# Altium PCB PCB_Heart-Earrings-1.7_2025-02-13.pcbdoc
Units mm, origin at the board's own origin, x right, y up, seen from the top; angles counter-clockwise.
Board outline 48.95 x 57.72 mm, 2 copper layers (Top Layer, Bottom Layer); 85 components, 33 nets, 214 pads, 78 vias.
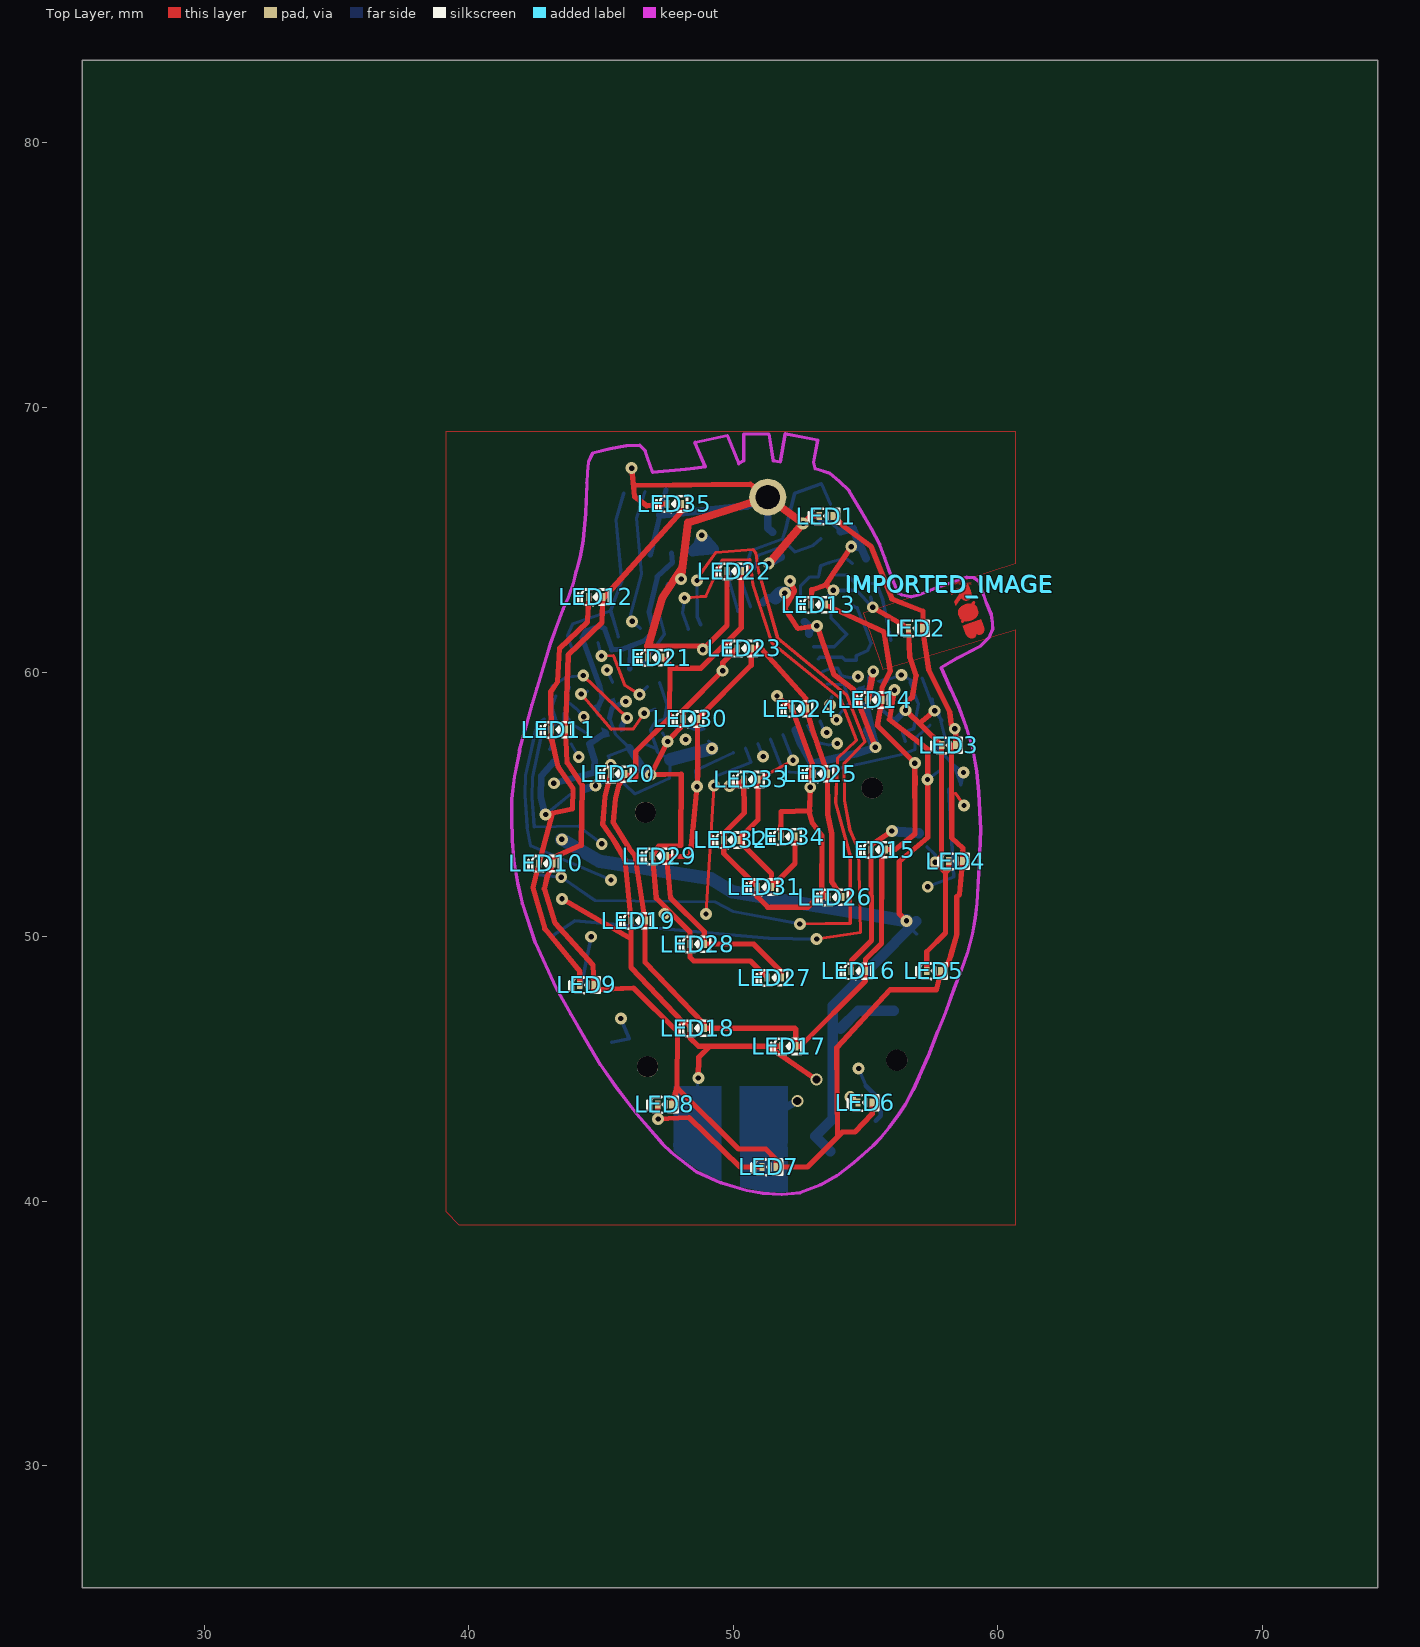
[diagram p0: Top Layer view]
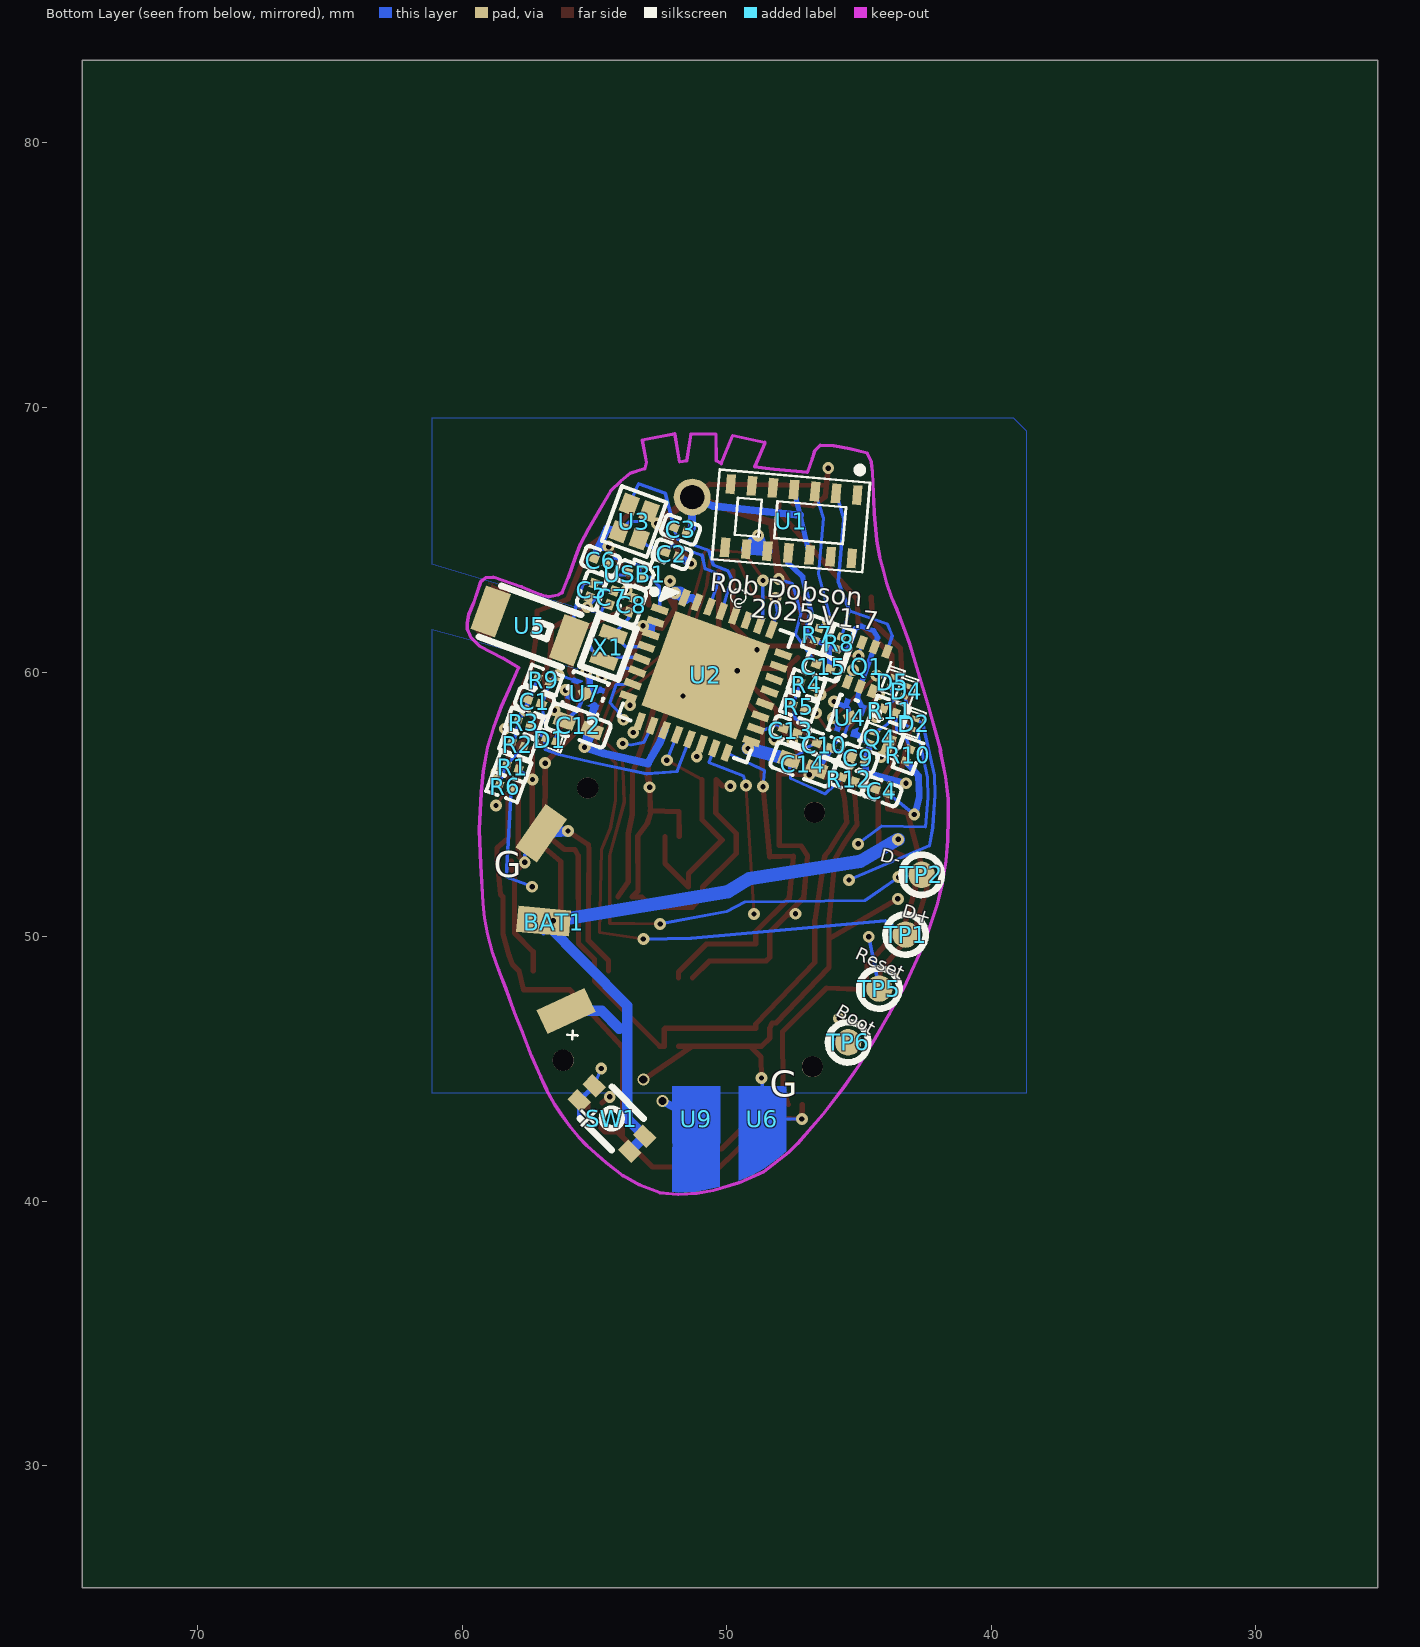
[diagram p1: Bottom Layer view, seen from below]

## Layer stack, top to bottom
Top Layer: signal copper (thickness not stored)
Dielectric: dielectric 0.32, FR-4, Dk 4.8
Bottom Layer: signal copper (thickness not stored)

## Board outline
74.35,25.4 25.4,25.4 25.4,83.12 74.35,83.12

## Components (designator, comment, footprint, x,y, rotation, side; value= is the part's Value field where it differs from the comment)
BAT1 "CP1154 li-ion" CP1154_LI_ION_NO_SILK 51.35,50.1 r95 bottom
C1 "1uF" C0201 57.26,58.88 r20 bottom
C2 "10pF" C0201 52.07,64.45 r200 bottom
C3 "10pF" C0201 51.74,65.38 r200 bottom
C4 "1uF" C0201 44.13,55.49 r200 bottom
C5 "10pF" C0201 55.1,63.09 r290 bottom
C6 "10pF" C0201 54.76,64.2 r20 bottom
C7 "10pF" C0201 54.34,62.81 r110 bottom
C8 "10pF" C0201 53.6,62.53 r290 bottom
C9 "1uF" C0201 45.02,56.74 r20 bottom
C10 "1uF" C0201 46.33,57.23 r200 bottom
C12 "10uF" C0402 55.61,57.98 r20 bottom
C13 "1uF" C0201 47.59,57.78 r200 bottom
C14 "10uF" C0402 47.12,56.51 r200 bottom
C15 "1uF" C0201 46.35,60.21 r20 bottom
D1 "BAT30F4-MS" X3-DFN0603-2_L0.6-W0.3-RD 56.69,57.44 r200 bottom
D2 "BAT30F4-MS" X3-DFN0603-2_L0.6-W0.3-RD 42.93,58.04 r110 bottom
D4 "BAT30F4-MS" X3-DFN0603-2_L0.6-W0.3-RD 43.22,59.28 r110 bottom
D5 "BAT30F4-MS" X3-DFN0603-2_L0.6-W0.3-RD 43.74,59.62 r110 bottom
IMPORTED_IMAGE "IMPORTED_IMAGE" IMPORTED_IMAGE#1 58.157,63.332 r0 top
IMPORTED_IMAGE "IMPORTED_IMAGE" IMPORTED_IMAGE#2 58.198,63.302 r0 top
LED1 "XL-0201SURC" LED-SMD_L0.7-W0.4-RD 53.51,65.9 r0 top
LED2 "XL-0201SURC" LED-SMD_L0.7-W0.4-RD 56.89,61.659 r0 top
LED3 "XL-0201SURC" LED-SMD_L0.7-W0.4-RD 58.14,57.24 r0 top
LED4 "XL-0201SURC" LED-SMD_L0.7-W0.4-RD 58.41,52.86 r0 top
LED5 "XL-0201SURC" LED-SMD_L0.7-W0.4-RD 57.58,48.71 r0 top
LED6 "XL-0201SURC" LED-SMD_L0.7-W0.4-RD 54.98,43.73 r0 top
LED7 "XL-0201SURC" LED-SMD_L0.7-W0.4-RD 51.35,41.3 r0 top
LED8 "XL-0201SURC" LED-SMD_L0.7-W0.4-RD 47.41,43.66 r0 top
LED9 "XL-0201SURC" LED-SMD_L0.7-W0.4-RD 44.47,48.18 r0 top
LED10 "XL-0201SURC" LED-SMD_L0.7-W0.4-RD 42.92,52.769 r0 top
LED11 "XL-0201SURC" LED-SMD_L0.7-W0.4-RD 43.39,57.83 r0 top
LED12 "XL-0201SURC" LED-SMD_L0.7-W0.4-RD 44.8,62.84 r0 top
LED13 "XL-0201SURC" LED-SMD_L0.7-W0.4-RD 53.207,62.548 r0 top
LED14 "XL-0201SURC" LED-SMD_L0.7-W0.4-RD 55.35,58.95 r0 top
LED15 "XL-0201SURC" LED-SMD_L0.7-W0.4-RD 55.47,53.29 r0 top
LED16 "XL-0201SURC" LED-SMD_L0.7-W0.4-RD 54.731,48.705 r0 top
LED17 "XL-0201SURC" LED-SMD_L0.7-W0.4-RD 52.09,45.86 r0 top
LED18 "XL-0201SURC" LED-SMD_L0.7-W0.4-RD 48.635,46.546 r0 top
LED19 "XL-0201SURC" LED-SMD_L0.7-W0.4-RD 46.4,50.61 r0 top
LED20 "XL-0201SURC" LED-SMD_L0.7-W0.4-RD 45.63,56.15 r0 top
LED21 "XL-0201SURC" LED-SMD_L0.7-W0.4-RD 47.04,60.55 r0 top
LED22 "XL-0201SURC" LED-SMD_L0.7-W0.4-RD 50.032,63.818 r0 top
LED23 "XL-0201SURC" LED-SMD_L0.7-W0.4-RD 50.413,60.897 r0 top
LED24 "XL-0201SURC" LED-SMD_L0.7-W0.4-RD 52.49,58.62 r0 top
LED25 "XL-0201SURC" LED-SMD_L0.7-W0.4-RD 53.29,56.16 r0 top
LED26 "XL-0201SURC" LED-SMD_L0.7-W0.4-RD 53.842,51.499 r0 top
LED27 "XL-0201SURC" LED-SMD_L0.7-W0.4-RD 51.556,48.451 r0 top
LED28 "XL-0201SURC" LED-SMD_L0.7-W0.4-RD 48.635,49.721 r0 top
LED29 "XL-0201SURC" LED-SMD_L0.7-W0.4-RD 47.21,53.05 r0 top
LED30 "XL-0201SURC" LED-SMD_L0.7-W0.4-RD 48.381,58.23 r0 top
LED31 "XL-0201SURC" LED-SMD_L0.7-W0.4-RD 51.175,51.88 r0 top
LED32 "XL-0201SURC" LED-SMD_L0.7-W0.4-RD 49.905,53.658 r0 top
LED33 "XL-0201SURC" LED-SMD_L0.7-W0.4-RD 50.667,55.944 r0 top
LED34 "XL-0201SURC" LED-SMD_L0.7-W0.4-RD 52.064,53.785 r0 top
LED35 "XL-0201SURC" LED-SMD_L0.7-W0.4-RD 47.76,66.36 r0 top
Q1 "NTZD3154NT1G" SOT-563_L1.6-W1.2-P0.50-LS1.6-TL 44.69,60.2 r290 bottom
Q4 "DMP21D0UFB4-7B" X2-DFN1006-3_L1.0-W0.6-BR 44.18,57.4 r200 bottom
R1 "4.7MΩ" R0201 58.09,56.41 r20 bottom
R2 "2.2MΩ" R0201 57.89,57.26 r20 bottom
R3 "100kΩ" R0201 57.66,58.08 r20 bottom
R4 "10kΩ" R0201 46.98,59.53 r200 bottom
R5 "10kΩ" R0201 47.27,58.69 r200 bottom
R6 "2.2MΩ" R0201 58.37,55.66 r20 bottom
R7 "10kΩ" R0201 46.58,61.42 r110 bottom
R8 "10kΩ" R0201 45.74,61.1 r110 bottom
R9 "10MΩ" R0201 56.91,59.7 r20 bottom
R10 "10kΩ" R0201 43.15,56.86 r290 bottom
R11 "100kΩ" R0201 43.84,58.54 r200 bottom
R12 "10kΩ" R0201 45.39,55.95 r200 bottom
SW1 "SKTAAAE010" KEY-SMD_4P-L2.6-W1.6-P0.80-LS3.0 54.34,43.13 r225 bottom
TP1 "D+" TESTPAD0 43.24,50.08 r0 bottom
TP2 "D-" TESTPAD0 42.63,52.34 r0 bottom
TP5 "EN" TESTPAD0 44.23,48.04 r0 bottom
TP6 "9" TESTPAD0 45.41,46.01 r0 bottom
U1 "MAX30101EFD+T" OESIP-14_L5.6-W3.3-P0.80-TL 47.56,65.7 r95 bottom
U2 "ESP32-C3FH4" QFN-32_L5.0-W5.0-P0.50-TL-EP3.7 50.794,59.881 r20 bottom
U3 "40MHz" CRYSTAL-SMD_4P-L1.6-W1.2-BL 53.49,65.69 r290 bottom
U4 "NCP170AMX180TCG" XDFN-4_L1.0-W1.0-P0.65-BL-EP 45.32,58.27 r200 bottom
U5 "ANT3216LL00R2400A" ANT-SMD_L3.2-W1.6 57.44,61.75 r200 bottom
U6 "SLIDE_CONTACT" SLIDE_CONTACT 48.65,43.1 r0 bottom
U7 "NCP167BMX330TBG" XDFN-4_L1.0-W1.0-P0.65-BL-EP 55.34,59.19 r290 bottom
U9 "SLIDE_CONTACT" SLIDE_CONTACT 51.15,43.1 r0 bottom
USB1 "1nH" L0201 53.48,63.69 r20 bottom
X1 "32.768kHz" CRYSTAL-SMD_L1.7-W1.1 54.47,60.94 r290 bottom

## Footprints (in the part's own frame and the unit in brackets; to place one, negate y for a bottom-side part, rotate by r counter-clockwise, add the part's x,y. Pads: shape width x height; smd on the part's side, far side on the other; paste and mask are expansions set on the pad)
ANT-SMD_L3.2-W1.6 [mm]
  rect 1x1.75 smd paste+0 mask+0.051: 1(1.578,0) 2(-1.578,0)
  silkscreen extent -1.68,-1.06 1.68,1.05
C0201 [mm]
  rect 0.368x0.324 smd paste-100 mask+0.051: 1(0.274,0) 2(-0.274,0)
  silkscreen extent -0.69,-0.39 0.69,0.39
C0402 [mm]
  rect 0.79x0.54 smd paste-100 mask+0.051: 1(0.545,0) 2(-0.545,0)
  silkscreen extent -1.17,-0.5 1.17,0.5
CP1154_LI_ION_NO_SILK [mm]
  rect 1x2 smd rot 30 paste+0 mask+0.051: 1(-3.302,4.445)
  rect 1x2 smd paste+0 mask+0.051: 1(0,5.588)
  rect 2x1 smd rot 150 paste+0 mask+0.051: 2(3.302,5.969)
  silkscreen extent -4.35,3.94 -4.03,4.32
CRYSTAL-SMD_4P-L1.6-W1.2-BL [mm]
  rect 0.73x0.6 smd paste+0 mask+0.05: 1(0.55,0.4) 2(-0.55,0.4) 3(-0.55,-0.4) 4(0.55,-0.4)
  silkscreen extent -1.1,-0.9 1.35,1.15
CRYSTAL-SMD_L1.7-W1.1 [mm]
  rect 0.5x1 smd paste+0 mask+0.05: 1(0.525,0) 2(-0.525,0)
  silkscreen extent -1.02,-0.76 1.02,0.76
IMPORTED_IMAGE#1 [mm]
IMPORTED_IMAGE#2 [mm]
  Top Layer region: 111 vertices and 2 holes, not listed, extent 0.479,-2.024 1.284,-1.308
  Top Layer region: 134 vertices and 2 holes, not listed, extent 0.299,-1.43 1.059,-0.632
  Top Layer region: 0.411,-0.493 0.201,-0.802 0.146,-0.65 0.345,-0.364 0.314,-0.278 0.046,-0.375 0.034,-0.342 0.026,-0.322 0.018,-0.3 0.011,-0.28 0.004,-0.262 0,-0.248 0.014,-0.243 0.04,-0.233 0.12,-0.201 0.171,-0.181 0.227,-0.159 0.287,-0.136 0.348,-0.113 0.408,-0.09 0.467,-0.068 0.522,-0.048 0.572,-0.03 0.614,-0.016 0.648,-0.005 0.671,0 0.683,0 0.69,-0.012 0.702,-0.036 0.716,-0.07 0.73,-0.107 0.745,-0.144 0.756,-0.176 0.768,-0.207 0.777,-0.233 0.785,-0.258 0.791,-0.283 0.797,-0.307 0.802,-0.329 0.805,-0.351 0.807,-0.371 0.807,-0.39 0.807,-0.407 0.805,-0.423 0.802,-0.439 0.798,-0.454 0.793,-0.469 0.787,-0.483 0.78,-0.496 0.772,-0.509 0.763,-0.521 0.753,-0.532 0.742,-0.543 0.73,-0.553 0.717,-0.562 0.702,-0.57 0.687,-0.577 0.67,-0.584 0.652,-0.59 0.634,-0.594 0.616,-0.597 0.599,-0.598 0.582,-0.598 0.565,-0.596 0.549,-0.593 0.532,-0.588 0.516,-0.582 0.5,-0.574 0.485,-0.565 0.47,-0.554 0.455,-0.541 0.441,-0.526 0.427,-0.51 0.413,-0.492 hole: 587692.694,628345.815 587849.916,628350.066 587849.916,628350.066 588009.377,628376.367 588009.377,628376.367 588171.004,628424.646 588171.004,628424.646 588303.509,628481.38 588303.509,628481.38 588422.178,628549.9 588422.178,628549.9 588527.084,628630.279 588527.084,628630.279 588618.298,628722.588 588618.298,628722.588 588696.403,628827.355 588696.403,628827.355 588755.458,628948.458 588755.458,628948.458 588795.463,629085.848 588795.463,629085.848 588816.418,629239.478 588816.418,629239.478 588819.803,629349.627 588819.803,629349.627 588813.211,629469.348 588813.211,629469.348 588796.666,629598.595 588796.666,629598.595 588770.19,629737.318 588770.19,629737.318 588735.706,629889.008 588735.706,629889.008 588690.148,630054.914 588690.148,630054.914 588633.494,630235.059 588633.494,630235.059 588565.72,630429.468 588565.72,630429.468 588236.536,631333.708 588236.536,631333.708 586118.176,630562.818 586118.176,630562.818 586345.252,629936.708 586345.252,629936.708 586423.417,629728.881 586423.417,629728.881 586499.843,629539.389 586499.843,629539.389 586574.602,629368.28 586574.602,629368.28 586647.766,629215.602 586647.766,629215.602 586724.117,629077.776 586724.117,629077.776 586800.42,628953.855 586800.42,628953.855 586876.723,628843.842 586876.723,628843.842 586953.074,628747.734 586953.074,628747.734 587096.048,628600.145 587096.048,628600.145 587241.142,628486.94 587241.142,628486.94 587388.378,628408.121 587388.378,628408.121 587537.782,628363.686 587537.782,628363.686 587692.694,628345.815
KEY-SMD_4P-L2.6-W1.6-P0.80-LS3.0 [mm]
  rect 0.72x0.55 smd paste+0 mask+0.051: 1(1.35,-0.4) 2(-1.35,-0.4) 3(1.35,0.4) 4(-1.35,0.4)
  silkscreen extent -0.85,-0.85 0.85,0.85
L0201 [mm]
  rect 0.368x0.324 smd paste-100 mask+0.051: 1(0.274,0) 2(-0.274,0)
  silkscreen extent -0.69,-0.39 0.69,0.39
LED-SMD_L0.7-W0.4-RD [mil]
  rect 8x12 smd paste+0 mask+1.97: 1(-10.5,0) 2(10.5,0)
  silkscreen extent -26,-12 19,11
OESIP-14_L5.6-W3.3-P0.80-TL [mm]
  rect 0.75x0.35 smd paste+0 mask+0.05: 1(1.2,-2.4) 2(1.2,-1.6) 3(1.2,-0.8) 4(1.2,0) 5(1.2,0.8) 6(1.2,1.6) 7(1.2,2.4) 8(-1.2,2.4) 9(-1.2,1.6) 10(-1.2,0.8) 11(-1.2,0) 12(-1.2,-0.8) 13(-1.2,-1.6) 14(-1.2,-2.4)
  silkscreen extent -1.69,-2.84 2.28,2.86
QFN-32_L5.0-W5.0-P0.50-TL-EP3.7 [mm]
  rect 0.65x0.28 smd paste-100 mask+0.051: 1(2.478,-1.75) 2(2.478,-1.25) 3(2.478,-0.75) 4(2.478,-0.25) 5(2.478,0.25) 6(2.478,0.75) 7(2.478,1.25) 8(2.478,1.75) 17(-2.478,1.75) 18(-2.478,1.25) 19(-2.478,0.75) 20(-2.478,0.25) 21(-2.478,-0.25) 22(-2.478,-0.75) 23(-2.478,-1.25) 24(-2.478,-1.75)
  rect 0.28x0.65 smd paste-100 mask+0.051: 9(1.75,2.478) 10(1.25,2.478) 11(0.75,2.478) 12(0.25,2.478) 13(-0.25,2.478) 14(-0.75,2.478) 15(-1.25,2.478) 16(-1.75,2.478) 25(-1.75,-2.478) 26(-1.25,-2.478) 27(-0.75,-2.478) 28(-0.25,-2.478) 29(0.25,-2.478) 30(0.75,-2.478) 31(1.25,-2.478) 32(1.75,-2.478)
  rect 3.8x3.8 smd paste-100 mask+0.051: 33(0,0)
  silkscreen extent -2.58,-2.58 3,2.58
R0201 [mm]
  rect 0.303x0.324 smd paste-100 mask+0.051: 1(0.242,0) 2(-0.242,0)
  silkscreen extent -0.62,-0.39 0.62,0.39
SLIDE_CONTACT [mm]
  Top Layer region: 0.9,-1.25 -0.9,-1.25 -0.9,0.9 -0.65,1.25 0.65,1.25 0.9,0.9
SOT-563_L1.6-W1.2-P0.50-LS1.6-TL [mm]
  rect 0.5x0.3 smd paste+0 mask+0.051: 1(0.8,-0.5) 2(0.8,0) 3(0.8,0.5) 4(-0.8,0.5) 5(-0.8,0) 6(-0.8,-0.5)
  silkscreen extent -0.48,-0.99 0.9,0.79
TESTPAD0 [mm]
  round 1 smd paste+0 mask+0.051: 1(0,0)
  silkscreen extent -0.76,-0.76 0.76,0.76
X2-DFN1006-3_L1.0-W0.6-BR [mm]
  rect 0.4x0.25 smd paste+0 mask+0.051: 1(-0.325,0.225) 2(-0.325,-0.225)
  rect 0.4x0.7 smd paste+0 mask+0.051: 3(0.325,0)
  silkscreen extent -0.69,-0.51 0.71,0.73
X3-DFN0603-2_L0.6-W0.3-RD [mm]
  rect 0.2x0.3 smd paste+0 mask+0.051: 1(0.2,0) 2(-0.2,0)
  silkscreen extent -0.46,-0.3 0.55,0.3
XDFN-4_L1.0-W1.0-P0.65-BL-EP [mm]
  rect 0.45x0.45 smd rot 45 paste+0 mask+0.051: 5(0,0)
  Top Layer region: -0.425,0.65 -0.225,0.65 -0.225,0.4 -0.375,0.25 -0.425,0.25
  Top Layer region: 0.425,-0.65 0.225,-0.65 0.225,-0.4 0.375,-0.25 0.425,-0.25
  Top Layer region: -0.425,-0.65 -0.225,-0.65 -0.225,-0.4 -0.375,-0.25 -0.425,-0.25
  Top Layer region: 0.225,0.4 0.225,0.65 0.425,0.65 0.425,0.2 0.375,0.25
  silkscreen extent -0.66,-0.7 0.98,0.7

## Free pads (board coordinates)
  round 1.4 hole 0.9 slot 0.905 at 0 deg paste+0 mask+0.051: 1(51.302,66.612)
  round 0.8 hole 0.8 unplated paste+0: ""(46.68,54.7) ""(46.76,45.09) ""(55.25,55.62) ""(56.18,45.33)

## Via types
v1: diameter 0.45, hole 0.2, Top Layer to Bottom Layer, tented both sides, 76 vias
v2: diameter 0.45, hole 0.31, Top Layer to Bottom Layer, tented both sides, 2 vias

## Nets (pads, with @x,y where several pads share a name; then routed paths per layer and width w, separated by ;. In a path a pad name is that pad's centre, name@x,y a point inside that pad or via, vN(x,y) a via of type N, cw(c..) or ccw(c..) an arc to the next point about the centre after c; other vN are vias at no path point)
1.8V: C15.2 Q1.2 Q1.5 R7.2 R8.2 U1.11 | length 10.7
  Bottom Layer w0.2: Q1.5@44.416,60.951 44.291,61.304 44.436,61.558 44.919,61.741 45.137,61.645 45.41,60.85 45.823,60.872 46.664,61.192 47,61.53 46.812,62.259 47.13,63.61 47.7,64.15 U1.11@47.664,64.505 ; Q1.5 Q1.2 45.05,59.02 44.852,58.605 ; C15.2 46.14,60.994
ANT: C6.2 U2.1 USB1.2 | length 3.4
  Bottom Layer w0.127: U2.1 52.539,63.24 52.897,63.595 USB1.2 53.311,64.019 53.631,64.139 54.243,64.317 C6.2@54.502,64.106
BOOT_IO9: TP6.1 U2.15 | length 15.4
  Top Layer w0.12: v1(48.97,50.86) v1@49.27,55.711
  Mid-Layer 1 w0.12: v1(45.75,46.91) 48.889,47.4 v1(48.97,50.86)
  Bottom Layer w0.12: v1@49.27,55.711 49.36,56.07 50.669,56.59 U2.15
  Bottom Layer w0.127: TP6.1 46.069,46.14 v1(45.75,46.91)
  other v1: 49.27,55.71
CHG_IN: D5.2 Q4.3 R11.2 | length 23.2
  Mid-Layer 1 w0.3: v1@44.35,58.31 v1(44.16,56.79) 44.129,53.859 43.999,49.879 45.15,46.6 v2(52.42,43.79)
  Bottom Layer w0.12: D5.2@43.809,59.432 43.68,58.93 R11.2@44.068,58.622 ; Q4.3@43.875,57.288 v1(44.16,56.79) ; R11.2 v1(44.35,58.31)
  Bottom Layer w0.3: 51.149,43.1 v2(52.42,43.79)
ESP32_EN: C4.2 R12.1 TP5.1 U2.7 | length 22.7
  Mid-Layer 1 w0.12: v1@44.629,50.001 44.591,51.05 44.561,55.269 44.789,55.711 46.989,55.589 47.659,54.969 50.499,55.041 51.794,56.369 51.807,57.647 53.773,58.36 v1@53.9,58.2
  Bottom Layer w0.12: U2.7 54.18,59.521 54.411,58.851 53.829,58.21 v1@53.9,58.2 ; v1@44.789,55.711 45.163,55.866 v1@44.789,55.711
  Bottom Layer w0.127: TP5.1@44.23,48.028 44.42,48.98 v1@44.629,50.001
  Bottom Layer w0.3: C4.2 v1(44.79,55.71)
  other v1: 44.63,50 53.9,58.2
GND: BAT1.2 C1.1 C2.1 C3.1 C4.1 C5.1 C6.1 C7.1 C8.2 C9.1 C10.1 C12.1 C13.1 C14.1 C15.1 LED1.1 LED2.1 LED3.1 LED4.1 LED5.1 LED6.1 LED7.1 LED8.1 LED9.1 LED10.1 LED11.1 LED12.1 LED13.1 LED14.1 LED15.1 LED16.1 LED17.1 LED18.1 LED19.1 LED20.1 LED21.1 LED22.1 LED23.1 LED24.1 LED25.1 LED26.1 LED27.1 LED28.1 LED29.1 LED30.1 LED31.1 LED32.1 LED33.1 LED34.1 LED35.1 pad.1 R2.1 R3.1 R9.1 R10.1 U1.4 U1.12 U2.33 U3.2 U3.4 U4.5 U7.5 | length 183.5
  Top Layer w0.2: LED10.1 43.168,54.673 ; LED10.1@42.656,52.777 42.43,51.85 42.88,50.3 44.203,48.686 LED9.1 ; v1(42.91,54.62) 43.92,54.83 43.943,55.584 43.38,56.42 43.118,57.527 ; 43.12,57.45 43.105,59.257 43.357,59.628 43.43,60.9 44.489,61.901 LED12.1 ; v1(43.53,51.43) 46.133,49.923 ; v1@45.371,56.501 LED20.1 45.15,55.29 45.071,54.24 45.429,53.73 45.569,53.496 45.909,52.92 46.133,50.611 46.133,48.838 48.127,46.737 48.289,46.74 LED18.1@48.368,46.547 ; v1@46.161,67.71 46.271,66.631 46.734,66.289 LED35.1@47.494,66.359 ; 46.228,67.051 50.65,67.1 pad.1 ; LED21.1 46.78,60.98 48.85,61 v1(48.85,60.85) 49.765,61.764 LED22.1@49.765,63.819 ; LED8.1@47.144,43.661 v1(47.16,43.11) 48.33,43.171 50.26,41.299 LED7.1 ; v1(47.4,50.87) 47.745,50.805 ; LED30.1 48.114,58.564 v1(49.6,60.05) 49.6,60.351 LED23.1 ; LED30.1@48.114,58.231 48.119,58.03 v1(47.52,57.38) v1(46.88,56.12) 48.03,56.15 48.01,53.45 47.179,53.43 LED29.1 47.09,51.459 48.368,50.182 LED28.1@48.368,49.722 ; LED18.1 48.368,46.178 48.686,45.86 LED17.1 ; LED28.1 48.368,49.226 48.508,49.086 50.654,49.086 LED27.1 ; v1(48.68,44.66) 48.7,45.45 49.121,45.86 ; v1@49.859,55.691 50.156,55.701 LED33.1@50.4,55.945 ; LED33.1 50.413,54.674 49.638,53.899 LED32.1 49.638,53.15 LED31.1 50.908,51.512 51.302,51.118 52.826,51.118 53.207,51.499 LED26.1 ; 51.304,45.86 v2(53.15,44.6) ; v1(51.65,59.1) 52.224,58.619 52.981,56.549 v1@52.91,55.65 ; LED34.1@51.797,53.786 51.8,54.72 52.892,54.759 ; v1(52.64,65.62) 52.92,65.9 LED1.1 ; LED13.1 52.97,63.11 53.49,63.3 ; LED25.1@53.024,56.161 v1@52.91,55.65 ; LED26.1@53.575,51.5 53.349,51.723 53.357,53.809 53.001,54.281 52.879,54.66 v1@52.91,55.65 ; v1(53.78,63.09) 53.49,63.3 ; v1@54.421,43.951 LED6.1@54.713,43.73 ; v1(54.46,64.74) 53.49,63.3 ; LED16.1@54.464,48.706 54.464,49.099 55.226,49.861 LED15.1 55.221,53.471 v1(55.992,53.993) ; v1@55.269,62.45 LED2.1@56.623,61.66 ; LED2.1 56.67,60.55 56.91,59.87 56.76,59.05 56.522,58.864 v1(56.51,58.56) LED3.1 57.873,53.054 v1@57.629,52.81 ; 57.034,58.052 v1(57.61,58.54) ; LED5.1 57.313,49.433 58.02,50.14 58.02,52.42 ; v1(57.63,52.81) 58.02,52.42 ; LED4.1 58.143,52.543 58.02,52.42 ; LED2.1@56.623,61.66 56.623,61.528 LED2.1@56.623,61.66
  Top Layer w0.25: LED14.1@55.084,58.95 v1(55.29,60.03)
  Top Layer w0.3: 46.78,60.98 47.319,62.81 48.086,63.989 ; v1(48.03,63.52) 48.29,65.65 pad.1 v1(52.64,65.62) v1(51.34,64.1)
  Mid-Layer 1 w0.3: v1(42.91,54.62) 42.47,51.89 v1(43.53,51.43) ; v2(53.15,44.6) v1(54.42,43.95)
  Bottom Layer w0.12: v1(42.91,54.62) C4.1 ; C9.1@45.277,56.834 v1@45.371,56.501 ; C9.1 C10.1 45.55,57.65 U4.5 ; C15.1@46.608,60.304 47.403,61.442 47.19,62.21 47.52,63.34 v1@48.03,63.519 ; C13.1@47.332,57.687 v1(47.52,57.38) ; R9.1 v1@57.611,58.541 ; C1.1 v1@57.611,58.541 ; R3.1@57.888,58.162 v1@57.611,58.541 ; R2.1 58.028,57.443 57.743,58.574 v1@57.611,58.541
  Bottom Layer w0.127: v1(47.16,43.11) 47.969,43.1 48.65,43.1 48.65,44.63 v1(48.68,44.66) ; v1(52.64,65.62) 52.926,65.906 U3.2 53.306,65.69 53.49,65.69 53.674,65.69 U3.4 ; C8.2 53.506,62.816 v1(53.78,63.09) ; v1@53.781,63.09 54.655,63.09 55.269,62.45 C5.1@55.193,62.833 ; BAT1.2@57.319,53.402 57.63,53.091 v1(57.63,52.81) ; v1(53.78,63.09) 53.802,63.068 C7.1 54.224,63.09 v1(53.78,63.09)
  Bottom Layer w0.15: U7.5 55.64,58.55 C12.1
  Bottom Layer w0.2: U4.5@45.32,58.269 45.417,58.645 v1@45.94,58.891 ; U1.12 U1.4
  Bottom Layer w0.25: v1@42.887,54.604 42.72,55.27 42.75,56.08 R10.1 ; 54.782,59.333 U7.5 ; U7.5@55.152,59.178 55.178,59.762 v1(55.29,60.03) ; C12.1@56.123,58.167 v1@56.509,58.561
  Bottom Layer w0.3: C10.1 C14.1 ; 47.225,65.93 50.52,66.28 pad.1 ; pad.1@51.302,66.613 51.302,65.447 C3.1@51.482,65.287 ; v1(51.34,64.1) C2.1@51.812,64.357 ; U3.4 54.52,65.42 C6.1@55.018,64.294 ; v1(54.46,64.74) 54.836,64.704
  Bottom Layer w0.4: C14.1@46.608,56.323 v1(46.88,56.12) ; v1(55.992,53.993) BAT1.2
  other v1: 52.91,55.65 49.86,55.69 45.37,56.5 45.94,58.89 55.27,62.45 46.16,67.71
LEDS_1: LED1.2 LED2.2 LED3.2 LED4.2 LED5.2 LED6.2 LED7.2 LED8.2 LED9.2 LED10.2 LED11.2 LED12.2 LED35.2 U2.10 | length 79.7
  Top Layer w0.12: 58.409,55.416 v1@58.721,54.959
  Top Layer w0.2: LED10.2@43.186,52.77 43.189,52.991 44.251,53.461 44.291,55.726 43.72,56.58 LED11.2 43.729,59.571 43.76,60.64 45.04,61.88 LED12.2 45.066,62.762 48.04,66.07 LED35.2@48.028,66.359 ; LED10.2@43.189,52.777 43.189,52.727 42.97,52.28 42.86,51.81 43.26,50.52 44.7,48.93 LED9.2 ; LED9.2 44.731,48 46.229,48.061 47.891,46.41 47.87,44.34 47.677,43.661 47.898,44.273 50.194,41.975 51.226,41.975 51.617,41.584 LED7.2 ; LED7.2 52.8,41.3 54.123,42.613 54.6,42.62 55.25,43.3 LED6.2@55.247,43.73 ; LED1.2 54.16,65.52 55.2,64.76 55.991,62.77 57.17,62.3 LED2.2 ; 53.941,42.441 53.91,45.8 55.93,48 57.68,48 LED5.2 ; LED2.2@57.149,61.66 57.39,60.08 58.18,58.49 58.241,58.03 58.371,57.86 58.406,57.644 58.406,57.24 58.246,57.24 58.251,53.73 58.678,53.354 LED4.2@58.678,52.861 ; LED5.2 58.09,48.95 58.22,49.29 58.449,50.1 58.449,51.507 58.551,51.599 58.67,52.95 58.677,53.235 LED4.2
  Mid-Layer 1 w0.12: v1@53.931,57.301 55.523,52.686 58.99,54.421 v1@58.721,54.959
  Bottom Layer w0.12: U2.10 53.12,57.35 53.61,57.25 v1(53.93,57.3)
  other v1: 58.72,54.96 58.37,57.86
LEDS_2: LED13.2 LED14.2 LED15.2 LED16.2 LED17.2 LED18.2 LED19.2 LED20.2 LED21.2 LED22.2 U2.8 | length 52.5
  Top Layer w0.2: LED21.2@47.306,60.55 47.611,60.26 47.591,58.269 46.311,56.991 46.311,56.021 LED20.2 45.68,55.75 45.55,55.23 45.46,54.32 46.06,53.35 46.29,53.049 46.666,50.611 46.666,49.033 48.901,46.699 LED18.2@48.901,46.547 ; 47.705,60.151 48.782,60.151 50.298,61.667 LED22.2@50.298,63.819 ; LED18.2 52.318,46.546 52.357,46.507 LED17.2 52.53,45.86 54.997,48.327 54.997,48.706 54.997,49.148 55.599,49.75 55.61,53.06 LED15.2 56.13,53.311 56.869,53.89 v1(56.86,56.56) 55.439,57.979 55.617,58.95 55.617,59.404 55.93,60.04 55.7,61.51 LED13.2@53.473,62.549 ; 56.859,55.391 56.882,56.046
  Mid-Layer 1 w0.12: v1@53.651,58.749 55.841,58.64 v1(56.86,56.56)
  Bottom Layer w0.12: v1@53.651,58.749 U2.8@53.72,59.084
  other v1: 53.65,58.75
LEDS_3: LED23.2 LED24.2 LED25.2 LED26.2 LED27.2 LED28.2 LED29.2 LED30.2 U2.16 | length 29.9
  Top Layer w0.2: LED30.2 50.68,60.262 LED23.2 ; LED30.2@48.647,58.231 48.66,56.13 48.63,55.67 48.371,53.019 LED29.2 47.631,51.469 48.901,50.199 48.901,49.722 50.768,49.722 51.822,48.668 LED27.2@51.822,48.452 ; LED23.2@50.679,60.898 51.048,60.898 52.75,58.99 52.757,58.619 52.99,57.82 53.557,56.161 53.57,54.619 53.72,53.89 53.72,52.079 LED26.2@54.108,51.5
  Bottom Layer w0.12: v1@48.63,55.67 48.571,56.28 U2.16@49.996,56.953
  other v1: 48.63,55.67
LEDS_4: LED31.2 LED32.2 LED33.2 LED34.2 U2.12 | length 9.7
  Top Layer w0.12: LED33.2@50.933,55.945 v1@52.259,56.671
  Top Layer w0.2: LED33.2 50.934,54.42 LED32.2 51.442,52.388 LED31.2 52.331,52.769 LED34.2
  Bottom Layer w0.12: U2.12 v1@52.259,56.671
  other v1: 52.26,56.67
PWR_BTN: D2.1 R6.2 | length 24.7
  Mid-Layer 1 w0.12: v1@45.381,52.14 45.65,52.099 v1@57.349,51.891
  Bottom Layer w0.12: D2.1 42.59,58.06 42.15,56.1 42.13,55.361 42.211,54.131 42.33,53.44 v1@45.381,52.14 ; v1(57.35,51.89) 58.33,52.26 R6.2
  other v1: 45.38,52.14
PWR_CTRL: D1.2 R3.2 U2.13 | length 7.6
  Bottom Layer w0.12: U2.13@51.406,57.466 51.87,56.25 53.023,56.16 54.95,56.57 56.35,56.89 56.87,57.08 D1.2 ; D1.2@56.877,57.509 R3.2@57.433,57.997
PWR_EN: C1.2 D1.1 D4.1 D5.1 R9.2 | length 25.8
  Top Layer w0.12: v1@44.329,59.869 v1@45.991,58.269
  Mid-Layer 1 w0.12: v1@45.991,58.269 46.019,57.989 45.41,58.53 45.49,59.11 46.25,59.549 46.389,60.86 49.341,61.909 49.341,62.902 52.127,63.933 53.049,63.61 53.875,61.563 56.575,60.42 v1@56.349,59.889
  Bottom Layer w0.12: D4.1@43.151,59.468 D5.1 v1(44.33,59.87) ; 45.831,57.931 v1@45.991,58.269 ; 55.675,59.658 v1(56.35,59.89) ; v1@56.349,59.889 R9.2@56.778,59.661 ; D1.1@56.501,57.372 56.389,57.71 56.821,57.86 C1.2 ; R9.2@56.684,59.618 C1.2 ; 56.885,59.038 C1.2
  other v1: 45.99,58.27
Q4_1: Q4.1 R10.2 R11.1 | length 2.7
  Bottom Layer w0.12: R10.2@43.067,57.088 43.209,57.489 43.58,57.829 43.613,58.457 43.93,58.02 Q4.1@44.408,57.723
S$4252: 
S$4256: 
S$6966817811473577: 
SCL: Q1.3 R5.1 U2.6 | length 17.9
  Top Layer w0.12: v1@44.251,59.171 45.396,57.842 46.219,57.85 v1@46.631,58.449
  Mid-Layer 1 w0.12: v1@46.631,58.449 46.643,57.324 47.36,56.15 51.152,56.13 51.543,56.506 51.528,58.129 52.615,58.541 52.62,58.97 v1@54.71,59.831
  Bottom Layer w0.12: v1@44.251,59.171 Q1.3@44.495,59.277 ; v1@46.631,58.449 R5.1
  Bottom Layer w0.127: U2.6@53.379,60.024 53.74,60.151 53.951,60.151 54.08,59.859 54.411,59.79 54.71,59.831 v1@54.639,59.821
  other v1: 46.63,58.45 44.25,59.17 54.71,59.83
SCL1.8: Q1.4 R8.1 U1.2 | length 8.7
  Bottom Layer w0.12: Q1.4 43.742,61.38 43.92,61.816 45.351,62.308 45.504,61.864
  Bottom Layer w0.127: R8.1@45.658,61.327 45.37,62.33 45.78,63.42 45.569,65.759 U1.2
SDA: Q1.6 R4.1 U2.14 | length 11
  Top Layer w0.12: v1@45.02,60.611 45.475,60.626 45.917,59.491 v1@46.46,59.15
  Mid-Layer 1 w0.12: v1@46.521,59.125 47.22,58.731 47.22,58.233 46.89,58.03 46.89,57.436 47.52,56.42 50.73,56.43 v1(51.13,56.81)
  Bottom Layer w0.12: Q1.6 v1@45.02,60.611 ; v1@46.46,59.15 R4.1 ; U2.14 v1(51.13,56.81)
  other v1: 46.46,59.15 45.02,60.61
SDA1.8: Q1.1 R7.1 U1.3 | length 8.3
  Mid-Layer 1 w0.12: v1@45.231,60.08 45.431,60.151 45.63,61.71 v1@46.181,61.919
  Bottom Layer w0.12: v1(45.23,60.08) Q1.1 ; v1@46.181,61.919 46.092,62.084 46.527,63.707 46.341,65.82 U1.3@46.659,66.826
  Bottom Layer w0.127: v1@46.181,61.919 R7.1
  other v1: 46.18,61.92
SW1_2: D2.2 D4.2 SW1.2 SW1.4 | length 25.3
  Mid-Layer 1 w0.12: v1@45.03,53.509 44.87,51.68 49.369,51.571 v1@54.741,45.02
  Bottom Layer w0.12: D4.2@43.288,59.092 43.14,58.68 43.339,58.071 42.998,57.852 42.783,57.771 42.409,56.016 42.389,55.259 42.48,54.149 44.15,54.18 v1@45.03,53.509 ; v1(54.74,45.02) SW1.4
  Bottom Layer w0.175: SW1.4 SW1.2 55.578,43.237 55.38,43.04
  other v1: 45.03,53.51
TP1_1: TP1.1 U2.26 | length 32.5
  Top Layer w0.12: v1@48.609,63.499 49.338,64.52 50.751,64.629 50.86,64.479 50.951,63.829 51.68,61.279 54.271,59.15 54.969,57.36 54.19,56.559 54.2,55.15 54.401,54.07 54.731,53.29 54.809,50.161 v1@53.151,49.91
  Bottom Layer w0.127: TP1.1@43.24,50.08 43.999,50.601 51.34,49.94 v1@53.151,49.91 ; v1(48.63,63.46) 48.64,62.099 U2.26@48.772,61.782
  other v1: 53.15,49.91
TP2_1: TP2.1 U2.25 | length 32.5
  Top Layer w0.12: v1(48.16,62.8) 48.96,62.869 49.569,64.23 50.621,64.251 50.751,63.29 51.469,61.091 54.05,59 54.66,57.421 53.941,56.75 53.87,55.081 54.421,53.049 54.418,50.509 v1(52.514,50.484)
  Bottom Layer w0.12: v1@43.501,52.249 44.78,51.37 49.321,51.309 49.999,50.951 v1@52.59,50.471
  Bottom Layer w0.127: TP2.1@42.63,52.341 v1@43.501,52.249 ; v1(48.16,62.8) 48.081,62.239 U2.25
  other v1: 43.5,52.25
U2_18: C13.2 U2.18 | length 1.2
  Bottom Layer w0.127: C13.2@47.847,57.875 48.119,58.03 48.653,57.776 U2.18@48.894,57.86
U5_1: C5.2 U5.1 USB1.1 | length 4.1
  Bottom Layer w0.127: USB1.1 53.852,63.669 54.299,63.669 54.622,63.349 C5.2 ; C5.2@55.005,63.344 55.409,63.349 55.65,62.729 U5.1@55.958,61.21
VBAT: BAT1.1 C9.2 Q4.2 R1.2 SW1.1 SW1.3 U1.9 U1.10 | length 58
  Top Layer w0.2: v1(56.09,59.32) 55.9,58.21 57.349,57.08 57.349,53.75 56.27,52.841 56.27,50.88 v1@56.549,50.601
  Mid-Layer 1 w0.5: v1(43.52,53.68) 43.524,55.576 v1(43.22,55.8) 43.529,58.149 43.57,60.019 45.112,63.481 48.759,64.591 v1(48.81,65.17)
  Bottom Layer w0.12: v1(57.34,55.94) R1.2
  Bottom Layer w0.127: v1(56.55,50.6) 56.55,50.488 BAT1.1@56.938,50.1
  Bottom Layer w0.25: v1(43.22,55.8) 44.721,56.191 C9.2 ; C9.2 Q4.2 45.177,57.712
  Bottom Layer w0.4: SW1.1@53.669,41.893 53.103,42.457 53.76,43.115 53.76,47.388 BAT1.1@56.918,50.588 ; 54.053,46.533 54.718,47.198 BAT1.1@56.066,47.198 ; U1.10@48.462,64.573 48.66,64.774 v1(48.81,65.17) 49.26,64.644 U1.10@48.462,64.573
  Bottom Layer w0.5: v1(43.52,53.68) 44.942,52.854 49.16,52.19 49.961,51.7 BAT1.1@56.549,50.601
VDD: C10.2 C12.2 C14.2 R4.2 R5.2 R12.2 U2.2 U2.3 U2.11 U2.17 U2.31 U2.32 | length 36.2
  Top Layer w0.2: v1@51.949,62.991 51.949,62.409 ; v1(52.14,63.44) 52.31,63.07 51.949,62.409 ; v1@55.371,57.159 54.86,58.49 54.53,59.35 53.809,59.9 53.161,61.751 52.445,61.645 51.949,62.409
  Mid-Layer 1 w0.5: v1@48.2,57.451 49.191,57.111 50.911,59.6 50.06,62.269 51.68,62.91 v1(52.14,63.44)
  Bottom Layer w0.12: R12.2 46.28,55.4 47.59,55.99 C14.2 ; C10.2 47.107,57.091 ; R4.2@47.207,59.613 47.497,58.772 47.41,58.231 47.037,58.106 46.869,57.809 47.146,56.971 C14.2@47.631,56.697
  Bottom Layer w0.127: U2.17 49.351,57.103 v1@49.191,57.111 ; U2.3 53.16,61.728 v1(53.16,61.75)
  Bottom Layer w0.3: U2.31 51.292,62.808 U2.32 ; U2.11 52.55,57.28 52.981,56.549 54.64,56.92 ; U2.2 52.866,61.732 U2.3 ; 54.639,56.92 v1@55.371,57.159 ; 55.005,58.721 v1@55.371,57.159 ; C12.2@55.099,57.794 v1@55.371,57.159
  Bottom Layer w0.4: C12.2@55.099,57.794 v1@55.371,57.159
  Bottom Layer w0.5: C14.2@47.631,56.697 v1@49.191,57.111 ; U2.32 51.773,62.99 v1(51.95,62.99)
  other v1: 49.19,57.11 55.37,57.16 48.2,57.45
VSENSE: R1.1 R2.2 R6.1 U2.9 | length 10.6
  Mid-Layer 1 w0.12: v1(53.53,57.72) 55.78,58.05 56.89,55.315 58.752,56.084 v1@58.701,56.209
  Bottom Layer w0.12: U2.9 53.456,57.758 v1(53.53,57.72) ; R2.2 R1.1 ; R1.1 v1(58.7,56.21) R6.1 R1.1
XTAL_32K_N: C7.2 U2.5 X1.1 | length 4.2
  Bottom Layer w0.127: U2.5 53.274,60.56 54.12,60.56 54.233,60.447 X1.1 54.65,60.62 55.08,60.82 55.21,61.09 55,61.66 54.68,62.43 C7.2
XTAL_32K_P: C8.1 U2.4 X1.2 | length 2.5
  Bottom Layer w0.127: U2.4 53.82,60.963 X1.2 53.694,62.03 C8.1
XTAL_N: C3.2 U2.29 U3.3 | length 7.8
  Bottom Layer w0.127: U2.29@50.174,62.302 49.821,63.542 49.956,63.829 50.509,64.052 50.674,64.596 51.861,65.028 51.998,65.472 52.061,65.742 52.32,66.76 53.331,67.121 U3.3@53.677,66.341
XTAL_P: C2.2 U2.30 U3.1 | length 5.1
  Bottom Layer w0.127: U2.30@50.651,62.465 50.4,63.169 50.27,63.61 50.352,63.722 50.819,63.91 50.921,64.411 52.06,64.82 52.328,64.543 53.019,64.789 U3.1@53.303,65.035
pads on no net: U1.1 U1.5 U1.6 U1.7 U1.8 U1.13 U1.14 U2.19 U2.20 U2.21 U2.22 U2.23 U2.24 U2.27 U2.28 U5.2
copper on no net: | length 0

## Polygon pours and split planes (outlines as drawn)
GND on Bottom Layer (solid): 38.65,45.1 38.65,69.1 39.15,69.6 61.15,69.6 61.15,64.1 54.91,62.22 55.65,60.1 61.15,61.6 61.15,44.1 38.65,44.1 38.65,44.6
GND on Mid-Layer 2 (solid): 61.43,70.42 61.39,64.19 54.91,62.22 55.65,60.1 61.43,61.77 61.65,38.1 38.15,38.1 38.1,70.42
GND on Top Layer (solid): 39.15,69.1 60.65,69.1 60.65,64.1 54.91,62.22 55.65,60.1 60.65,61.6 60.65,39.1 39.65,39.1 39.15,39.6 39.15,69.1

## Other copper
Bottom Layer:
  region net GND: 49.55,42.097 49.54,40.78 49.01,41.01 48.6,41.23 48.01,41.67 47.75,41.9 47.74,42.2 48,41.85 49.31,41.85 49.55,42.19 49.55,42.18
  region net CHG_IN: 50.26,42.19 50.26,40.56 51.15,40.36 51.83,40.33 52.06,40.37 52.05,42.01 52.04,42.12 52.04,42.19

## Silkscreen, mask and mechanical layers (free items; w line width, h text height)
Bottom Overlay:
  circle w0.06: c49.56,62.86 r0.283
  text "Rob Dobson" at 50.657,63.082 h0.7 r6
  text "c" at 49.762,62.441 h0.5 r5
  text "2025" at 49.11,62.071 h0.7 r5
  text "V1.7" at 46.457,61.802 h0.7 r6
  text "D-" at 44.235,52.879 h0.5 r15
  text "G" at 58.81,52.24 h1
  text "D+" at 43.399,50.78 h0.5 r16
  text "Reset" at 45.176,49.183 h0.5 r25
  text "Boot" at 45.915,47.053 h0.5 r30
  text "G" at 48.37,43.95 h1
  text "+" at 55.286,42.426 h1 r315
Bottom Solder:
  region net GND: 49.59,41.7 49.58,40.69 49.11,40.89 48.81,41.03 48.33,41.35 47.96,41.63 47.71,41.86 47.7,42.27 48,41.86 49.32,41.86 49.589,42.258 49.6,41.71 49.58,41.7
  region net CHG_IN: 50.21,42.2 50.2,40.48 51.14,40.25 51.82,40.22 52.12,40.28 52.1,41.72 52.09,42.05 52.09,42.22
Document:
  circle w0.05: c47.299,59.451 r0.5